# Altium PCB Iot_board_pcb.PcbDoc (part 2 of 2)
Units mm, origin at the board's own origin, x right, y up, seen from the top; angles counter-clockwise.
Board outline 52.22 x 32.36 mm, 2 copper layers (Top Layer, Bottom Layer); 44 components, 33 nets, 185 pads, 33 vias.
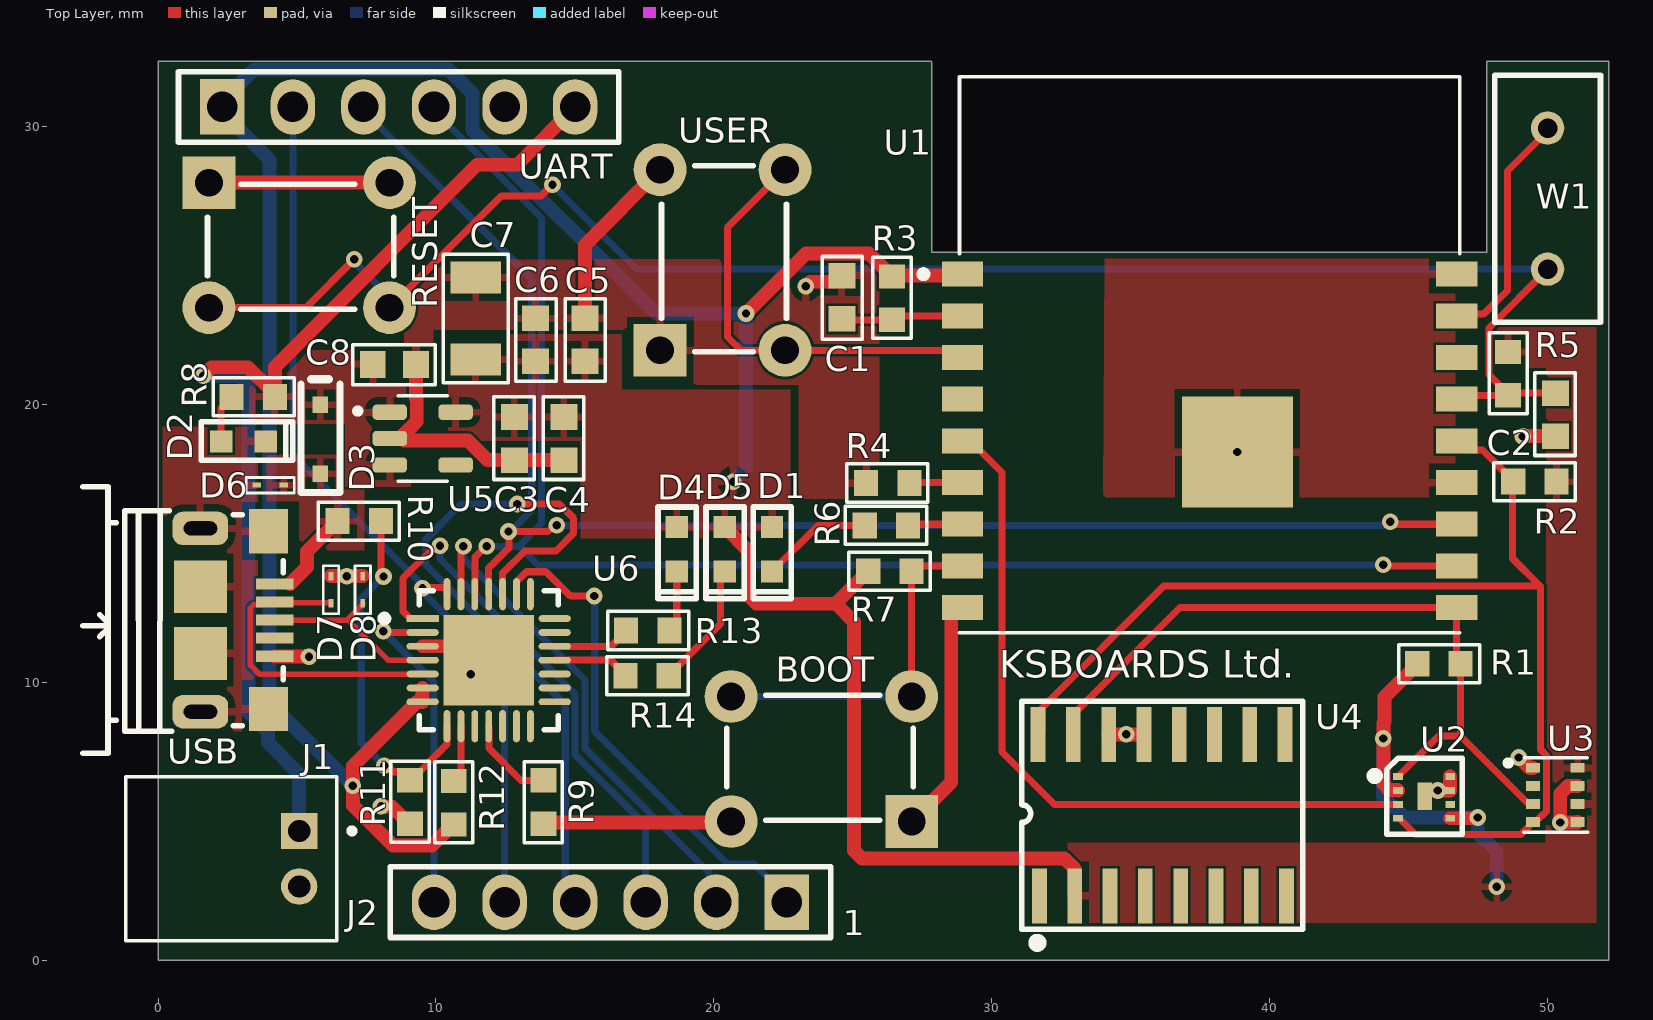
[diagram p0: Top Layer view]

## Part data (continued)
R8 R12: library part CRCW06032K00FKEA, "D11/CRCW0603 100 2K 1% ET1 e3", Case Code (Imperial)=0603, Case Code (Metric)=1608, Manufacturer=Vishay, Max Operating Temperature=155°C, Max Power Dissipation=100mW, Min Operating Temperature=-55°C, Package Quantity=10, Resistance=2kR, Resistance Tolerance=1%, Resistor Type="Thick Film", Supplier Part Number 1=541-2.00KHCT-ND, Temperature Coefficient=100ppm/°C, Voltage Rating=75V, Case/Package=0603, Category="Chip SMD Resistors", ComponentLink1Description=https://datasheet.ciiva.com/7673/1720486-7673525.pdf?src-supplier=Element14, ComponentLink1URL=https://datasheet.ciiva.com/7673/1720486-7673525.pdf?src-supplier=Element14, ComponentLink2Description=https://datasheet.ciiva.com/28621/125364-28621397.pdf?src-supplier=Element14, ComponentLink2URL=https://datasheet.ciiva.com/28621/125364-28621397.pdf?src-supplier=Element14, ComponentLink3Description=https://datasheet.ciiva.com/3257/dcrcwe3-3257366.pdf?src-supplier=Avnet, ComponentLink3URL=https://datasheet.ciiva.com/3257/dcrcwe3-3257366.pdf?src-supplier=Avnet, ComponentLink4Description=https://datasheet.ciiva.com/3257/dcrcwe3-3257367.pdf?src-supplier=Avnet, ComponentLink4URL=https://datasheet.ciiva.com/3257/dcrcwe3-3257367.pdf?src-supplier=Avnet, ComponentLink5Description=https://datasheet.ciiva.com/16882/dcrcw-16882855.pdf?src-supplier=Avnet+Europe, ComponentLink5URL=https://datasheet.ciiva.com/16882/dcrcw-16882855.pdf?src-supplier=Avnet+Europe, ComponentLink6Description=https://datasheet.ciiva.com/5551/dcrcwe3-109170-5551994.pdf?src-supplier=Mouser, ComponentLink6URL=https://datasheet.ciiva.com/5551/dcrcwe3-109170-5551994.pdf?src-supplier=Mouser, ComponentLink7Description=https://datasheet.ciiva.com/16755/70201119-16755770.pdf?src-supplier=Allied+Electronics, ComponentLink7URL=https://datasheet.ciiva.com/16755/70201119-16755770.pdf?src-supplier=Allied+Electronics, ComponentLink8Description=https://datasheet.ciiva.com/26314/fld-crcw-e3-data-en-26314682.pdf?src-supplier=Distrelec, ComponentLink8URL=https://datasheet.ciiva.com/26314/fld-crcw-e3-data-en-26314682.pdf?src-supplier=Distrelec, ComponentLink9Description=https://datasheet.ciiva.com/2465/dcrcwe3-2465564.pdf?src-supplier=Digi-Key, ComponentLink9URL=https://datasheet.ciiva.com/2465/dcrcwe3-2465564.pdf?src-supplier=Digi-Key, ComponentLink10Description=https://datasheet.ciiva.com/16765/70201119-16765388.pdf?src-supplier=Allied+Electronics, ComponentLink10URL=https://datasheet.ciiva.com/16765/70201119-16765388.pdf?src-supplier=Allied+Electronics, ComponentLink11Description=https://datasheet.ciiva.com/2465/dcrcwe3-2465565.pdf?src-supplier=Digi-Key, ComponentLink11URL=https://datasheet.ciiva.com/2465/dcrcwe3-2465565.pdf?src-supplier=Digi-Key, ComponentLink12Description=https://datasheet.ciiva.com/2465/dcrcwe3-2465566.pdf?src-supplier=Digi-Key, ComponentLink12URL=https://datasheet.ciiva.com/2465/dcrcwe3-2465566.pdf?src-supplier=Digi-Key, Construction=Rectangular, Contact Plating=Tin,Lead, Depth=0.85mm, Features="Automotive AEC-Q200", Height=0.45mm, Lead Free="Lead Free", Length=1.55mm, Manufacturer Part Number=CRCW06032K00FKEA, Military Standard=Not, Mount="Surface Mount", Number of Pins=2, Number of Terminations=2, Packaging="Tape and Reel", Power Rating=100mW, Pricing 1="1=0,10000, 10=0,03400, 100=0,01390, 1000=0,00624, 2500=0,00542 (USD)", Radiation Hardening=No, REACH SVHC=Unknown, RoHS=Yes, RoHS Compliant=Yes, Series=CRCW, Size Code=0603, Stock 1=244384, Supplier 1=Digi-Key, Technology="THICK FILM", Termination=Solder, Tolerance=1%, Voltage Rating (DC)=75V, Weight=7.1E-05oz, Width=0.85mm
R10: library part CRCW060322K0FKEA, "VISHAY - CRCW060322K0FKEA - Surface Mount Thick Film Resistor, AEC-Q200 CRCW Series, 22 kohm, 100 mW, - 1%, 75 V RoHS Compliant: Yes", Case Code (Imperial)=0603, Case Code (Metric)=1608, Manufacturer=Vishay, Max Operating Temperature=155°C, Max Power Dissipation=100mW, Min Operating Temperature=-55°C, Package Quantity=10, Resistance=22kR, Resistance Tolerance=1%, Resistor Type="Thick Film", Supplier Part Number 1=541-22.0KHCT-ND, Temperature Coefficient=100ppm/°C, Voltage Rating=75V, Case/Package=0603, Category="Chip SMD Resistors", ComponentLink1Description=https://datasheet.ciiva.com/11818/0900766b80d98afc-11818177.pdf?src-supplier=RSComponents, ComponentLink1URL=https://datasheet.ciiva.com/11818/0900766b80d98afc-11818177.pdf?src-supplier=RSComponents, ComponentLink2Description=https://datasheet.ciiva.com/15159/getdatasheetpartid-32846-15159349.pdf?src-supplier=Verical, ComponentLink2URL=https://datasheet.ciiva.com/15159/getdatasheetpartid-32846-15159349.pdf?src-supplier=Verical, ComponentLink3Description=https://datasheet.ciiva.com/2466/dcrcwe3-2466263.pdf?src-supplier=Digi-Key, ComponentLink3URL=https://datasheet.ciiva.com/2466/dcrcwe3-2466263.pdf?src-supplier=Digi-Key, ComponentLink4Description=https://datasheet.ciiva.com/7672/1697337-7672871.pdf?src-supplier=Element14, ComponentLink4URL=https://datasheet.ciiva.com/7672/1697337-7672871.pdf?src-supplier=Element14, ComponentLink5Description=https://datasheet.ciiva.com/2466/dcrcwe3-2466264.pdf?src-supplier=Digi-Key, ComponentLink5URL=https://datasheet.ciiva.com/2466/dcrcwe3-2466264.pdf?src-supplier=Digi-Key, ComponentLink6Description=https://datasheet.ciiva.com/7673/1720486-7673144.pdf?src-supplier=Element14, ComponentLink6URL=https://datasheet.ciiva.com/7673/1720486-7673144.pdf?src-supplier=Element14, ComponentLink7Description=https://datasheet.ciiva.com/16427/dcrcwe3-16427336.pdf?src-supplier=Future+Electronics, ComponentLink7URL=https://datasheet.ciiva.com/16427/dcrcwe3-16427336.pdf?src-supplier=Future+Electronics, ComponentLink8Description=https://datasheet.ciiva.com/16893/dcrcwe3-16893896.pdf?src-supplier=Avnet+Europe, ComponentLink8URL=https://datasheet.ciiva.com/16893/dcrcwe3-16893896.pdf?src-supplier=Avnet+Europe, ComponentLink9Description=https://datasheet.ciiva.com/2466/dcrcwe3-2466265.pdf?src-supplier=Digi-Key, ComponentLink9URL=https://datasheet.ciiva.com/2466/dcrcwe3-2466265.pdf?src-supplier=Digi-Key, ComponentLink10Description=https://datasheet.ciiva.com/8339/dcrcwe3-8339961.pdf?src-supplier=Avnet, ComponentLink10URL=https://datasheet.ciiva.com/8339/dcrcwe3-8339961.pdf?src-supplier=Avnet, ComponentLink11Description=https://datasheet.ciiva.com/16767/70201119-16767417.pdf?src-supplier=Allied+Electronics, ComponentLink11URL=https://datasheet.ciiva.com/16767/70201119-16767417.pdf?src-supplier=Allied+Electronics, ComponentLink12Description=https://datasheet.ciiva.com/26314/fld-crcw-e3-data-en-26314666.pdf?src-supplier=Distrelec, ComponentLink12URL=https://datasheet.ciiva.com/26314/fld-crcw-e3-data-en-26314666.pdf?src-supplier=Distrelec, Construction=Rectangular, Contact Plating=Tin, Depth=0.85mm, Features="Automotive AEC-Q200", Height=0.45mm, Lead Free="Lead Free", Length=1.55mm, Manufacturer Part Number=CRCW060322K0FKEA, Military Standard=Not, Mount="Surface Mount", Number of Terminations=2, Packaging="Tape and Reel", Power Rating=100mW, Pricing 1="1=0,10000, 10=0,03400, 100=0,01390, 1000=0,00624, 2500=0,00542 (USD)", Radiation Hardening=No, REACH SVHC=Unknown, RoHS=Yes, RoHS Compliant=Yes, Series=CRCW, Size Code=0603, Stock 1=142, Supplier 1=Digi-Key, Technology="THICK FILM", Termination=SMD/SMT, Tolerance=1%, Voltage Rating (DC)=75V, Weight=7.1E-05oz, Width=0.85mm
R11: library part CRCW060347K5FKEA, "Resistor;  Thick Film;  47.5 Kilohms;  0.1 W;  1%;  SMT;  0603;  TCR 37 ppm/DegC", Case Code (Imperial)=0603, Case Code (Metric)=1608, Manufacturer=Vishay, Max Operating Temperature=155°C, Max Power Dissipation=100mW, Min Operating Temperature=-55°C, Package Quantity=10, Resistance=47.5kR, Resistance Tolerance=1%, Resistor Type="Thick Film", Supplier Part Number 1=541-47.5KHCT-ND, Temperature Coefficient=100ppm/°C, Voltage Rating=75V, Case/Package=0603, Category="Chip SMD Resistors", ComponentLink1Description=https://datasheet.ciiva.com/11810/0900766b80d98afc-11810543.pdf?src-supplier=RSComponents, ComponentLink1URL=https://datasheet.ciiva.com/11810/0900766b80d98afc-11810543.pdf?src-supplier=RSComponents, ComponentLink2Description=https://datasheet.ciiva.com/2465/dcrcwe3-2465816.pdf?src-supplier=Digi-Key, ComponentLink2URL=https://datasheet.ciiva.com/2465/dcrcwe3-2465816.pdf?src-supplier=Digi-Key, ComponentLink3Description=https://datasheet.ciiva.com/7841/1697337-7841832.pdf?src-supplier=Element14, ComponentLink3URL=https://datasheet.ciiva.com/7841/1697337-7841832.pdf?src-supplier=Element14, ComponentLink4Description=https://datasheet.ciiva.com/2465/dcrcwe3-2465817.pdf?src-supplier=Digi-Key, ComponentLink4URL=https://datasheet.ciiva.com/2465/dcrcwe3-2465817.pdf?src-supplier=Digi-Key, ComponentLink5Description=https://datasheet.ciiva.com/7841/125364-7841833.pdf?src-supplier=Element14, ComponentLink5URL=https://datasheet.ciiva.com/7841/125364-7841833.pdf?src-supplier=Element14, ComponentLink6Description=https://datasheet.ciiva.com/2465/dcrcwe3-2465818.pdf?src-supplier=Digi-Key, ComponentLink6URL=https://datasheet.ciiva.com/2465/dcrcwe3-2465818.pdf?src-supplier=Digi-Key, ComponentLink7Description=https://datasheet.ciiva.com/16769/70201119-16769373.pdf?src-supplier=Allied+Electronics, ComponentLink7URL=https://datasheet.ciiva.com/16769/70201119-16769373.pdf?src-supplier=Allied+Electronics, ComponentLink8Description=https://datasheet.ciiva.com/16893/dcrcwe3-16893437.pdf?src-supplier=Avnet+Europe, ComponentLink8URL=https://datasheet.ciiva.com/16893/dcrcwe3-16893437.pdf?src-supplier=Avnet+Europe, Construction=Rectangular, Contact Plating=Tin, Depth=0.85mm, Features="Automotive AEC-Q200", Height=0.45mm, Lead Free="Lead Free", Length=1.55mm, Manufacturer Part Number=CRCW060347K5FKEA, Military Standard=Not, Mount="Surface Mount", Number of Terminations=2, Packaging="Tape and Reel", Power Rating=100mW, Pricing 1="1=0,10000, 10=0,03400, 100=0,01390, 1000=0,00624, 2500=0,00542 (USD)", Radiation Hardening=No, REACH SVHC=Unknown, RoHS=Yes, RoHS Compliant=Yes, Series=CRCW, Size Code=0603, Stock 1=47029, Supplier 1=Digi-Key, Technology="THICK FILM", Termination=SMD/SMT, Tolerance=1%, Voltage Rating (DC)=75V, Weight=7.1E-05oz, Width=0.85mm
R13 R14: library part CRCW0603330KFKEA, "Res Thick Film 0603 330K Ohm 1% 1/10W 100ppm/C Molded SMD Paper T/R", Case Code (Imperial)=0603, Case Code (Metric)=1608, Manufacturer=Vishay, Max Operating Temperature=155°C, Max Power Dissipation=100mW, Min Operating Temperature=-55°C, Package Quantity=10, Resistance=330kR, Resistance Tolerance=1%, Resistor Type="Thick Film", Supplier Part Number 1=541-330KHCT-ND, Temperature Coefficient=100ppm/°C, Voltage Rating=75V, Case/Package=0603, Category="Chip SMD Resistors", ComponentLink1Description=https://datasheet.ciiva.com/11810/0900766b80d98afc-11810796.pdf?src-supplier=RSComponents, ComponentLink1URL=https://datasheet.ciiva.com/11810/0900766b80d98afc-11810796.pdf?src-supplier=RSComponents, ComponentLink2Description=https://datasheet.ciiva.com/7673/1697337-7673301.pdf?src-supplier=Element14, ComponentLink2URL=https://datasheet.ciiva.com/7673/1697337-7673301.pdf?src-supplier=Element14, ComponentLink3Description=https://datasheet.ciiva.com/7673/1697337-7673302.pdf?src-supplier=Element14, ComponentLink3URL=https://datasheet.ciiva.com/7673/1697337-7673302.pdf?src-supplier=Element14, ComponentLink4Description=https://datasheet.ciiva.com/16778/70201119-16778744.pdf?src-supplier=Allied+Electronics, ComponentLink4URL=https://datasheet.ciiva.com/16778/70201119-16778744.pdf?src-supplier=Allied+Electronics, ComponentLink5Description=https://datasheet.ciiva.com/22708/1697337-22708424.pdf?src-supplier=Element14, ComponentLink5URL=https://datasheet.ciiva.com/22708/1697337-22708424.pdf?src-supplier=Element14, ComponentLink6Description=https://datasheet.ciiva.com/26317/fld-crcw-e3-data-en-26317177.pdf?src-supplier=Distrelec, ComponentLink6URL=https://datasheet.ciiva.com/26317/fld-crcw-e3-data-en-26317177.pdf?src-supplier=Distrelec, ComponentLink7Description=https://datasheet.ciiva.com/2465/dcrcwe3-2465930.pdf?src-supplier=Digi-Key, ComponentLink7URL=https://datasheet.ciiva.com/2465/dcrcwe3-2465930.pdf?src-supplier=Digi-Key, ComponentLink8Description=https://datasheet.ciiva.com/2465/dcrcwe3-2465931.pdf?src-supplier=Digi-Key, ComponentLink8URL=https://datasheet.ciiva.com/2465/dcrcwe3-2465931.pdf?src-supplier=Digi-Key, ComponentLink9Description=https://datasheet.ciiva.com/2465/dcrcwe3-2465932.pdf?src-supplier=Digi-Key, ComponentLink9URL=https://datasheet.ciiva.com/2465/dcrcwe3-2465932.pdf?src-supplier=Digi-Key, ComponentLink10Description=https://datasheet.ciiva.com/7792/125364-7792220.pdf?src-supplier=Element14, ComponentLink10URL=https://datasheet.ciiva.com/7792/125364-7792220.pdf?src-supplier=Element14, ComponentLink11Description=https://datasheet.ciiva.com/22870/70201119-22870764.pdf?src-supplier=Allied+Electronics, ComponentLink11URL=https://datasheet.ciiva.com/22870/70201119-22870764.pdf?src-supplier=Allied+Electronics, ComponentLink12Description=https://datasheet.ciiva.com/16203/dcrcwe3-16203007.pdf?src-supplier=Future+Electronics, ComponentLink12URL=https://datasheet.ciiva.com/16203/dcrcwe3-16203007.pdf?src-supplier=Future+Electronics, Construction=Rectangular, Contact Plating=Tin, Depth=0.85mm, Features="Automotive AEC-Q200", Height=0.45mm, Lead Free="Lead Free", Length=1.55mm, Manufacturer Part Number=CRCW0603330KFKEA, Military Standard=Not, Mount="Surface Mount", Number of Pins=2, Number of Terminations=2, Packaging="Tape and Reel", Power Rating=100mW, Pricing 1="1=0,10000, 10=0,03400, 100=0,01390, 1000=0,00624, 2500=0,00542 (USD)", Radiation Hardening=No, REACH SVHC=Unknown, RoHS=Yes, RoHS Compliant=Yes, Series=CRCW, Stock 1=470, Supplier 1=Digi-Key, Technology="THICK FILM", Termination=SMD/SMT, Tolerance=1%, Voltage Rating (DC)=75V, Weight=7.1E-05oz, Width=0.85mm, Working Voltage=75V
U1: Manufacturer="Espressif Systems", Supplier Part Number 1=1965-ESP-WROOM-02D(4MB)CT-ND, Manufacturer Part Number="ESP-WROOM-02D (4MB)", Pricing 1="1=3,20000 (USD)", RoHS=No, Stock 1=1303, Supplier 1=Digi-Key
U2: "Humidity/Temperature Sensor Digital Serial (I2C) 8-Pin DFN EP T/R", Manufacturer=Sensirion, Supplier Part Number 1=1649-1009-1-ND, Manufacturer Part Number=SHT30-DIS-B2.5KS, Pricing 1="1=2,78000, 10=2,52000, 25=2,25760, 50=1,99500, 100=1,94250, 500=1,62750, 1000=1,52250 (USD)", RoHS=Yes, RoHS Compliant=Yes, Stock 1=45, Supplier 1=Digi-Key
U3: "BMP280 Absolute Barometric Pressure Sensor for Battery Powered Devices 2 x 2.5mm", Case/Package=SMD/SMT, Manufacturer=Bosch, Max Operating Temperature=85°C, Min Operating Temperature=-40°C, Operating Pressure=15.95PSI, Supplier Part Number 1=828-1064-1-ND, Category="Pressure Sensors", ComponentLink1Description=https://ae-bst.resource.bosch.com/media/_tech/media/datasheets/BST-BMP280-DS001.pdf?src-supplier=Digi-Key, ComponentLink1URL=https://ae-bst.resource.bosch.com/media/_tech/media/datasheets/BST-BMP280-DS001.pdf?src-supplier=Digi-Key, Lead Free="Lead Free", Manufacturer Part Number=BMP280, Max Pressure=290.08PSI, Number of Pins=8, Output Type=SPI,I2C, Port Style="No Port", Pressure Type=Absolute, Pricing 1="1=3,26000, 5=3,02200, 10=2,51100, 25=2,09240, 50=1,86000, 100=1,76700, 500=1,48800, 1000=1,39500, 5000=1,30200 (USD)", RoHS=No, Supplier 1=Digi-Key, Termination=SMD/SMT
U4: "RTC, TCXO, CRYSTAL, 3.3V, 16SOIC", Case/Package=SOIC, Frequency=32.768kHz, Manufacturer=Maxim, Max Operating Temperature=85°C, Max Supply Voltage=5.5V, Min Operating Temperature=-40°C, Min Supply Voltage=2.3V, Operating Supply Voltage=3.3V, Package Quantity=46, Supplier Part Number 1=DS3231SN#-ND, Category="Real Time Clocks", ComponentLink1Description=https://datasheet.ciiva.com/23867/45724-23867216.pdf?src-supplier=Newark, ComponentLink1URL=https://datasheet.ciiva.com/23867/45724-23867216.pdf?src-supplier=Newark, ComponentLink2Description=https://datasheet.ciiva.com/1240/ds3231-ds3231s-1240689.pdf?src-supplier=Digi-Key, ComponentLink2URL=https://datasheet.ciiva.com/1240/ds3231-ds3231s-1240689.pdf?src-supplier=Digi-Key, ComponentLink3Description=https://datasheet.ciiva.com/1146/ds3231-1146707.pdf?src-supplier=Newark, ComponentLink3URL=https://datasheet.ciiva.com/1146/ds3231-1146707.pdf?src-supplier=Newark, ComponentLink4Description=https://datasheet.ciiva.com/1139/1675711-1139210.pdf?src-supplier=Element14, ComponentLink4URL=https://datasheet.ciiva.com/1139/1675711-1139210.pdf?src-supplier=Element14, ComponentLink5Description=https://datasheet.ciiva.com/26795/ds3231sn-26795694.pdf?src-supplier=IIIC, ComponentLink5URL=https://datasheet.ciiva.com/26795/ds3231sn-26795694.pdf?src-supplier=IIIC, ComponentLink6Description=https://datasheet.ciiva.com/25889/ds3231-25889895.pdf?src-supplier=Avnet+Europe, ComponentLink6URL=https://datasheet.ciiva.com/25889/ds3231-25889895.pdf?src-supplier=Avnet+Europe, ComponentLink7Description=https://datasheet.ciiva.com/4772/ds3231-102175-4772091.pdf?src-supplier=Mouser, ComponentLink7URL=https://datasheet.ciiva.com/4772/ds3231-102175-4772091.pdf?src-supplier=Mouser, ComponentLink8Description=https://datasheet.ciiva.com/14244/ds3231-14244059.pdf?src-supplier=Avnet, ComponentLink8URL=https://datasheet.ciiva.com/14244/ds3231-14244059.pdf?src-supplier=Avnet, ComponentLink9Description=https://datasheet.ciiva.com/12291/ds3231-102175-12291423.pdf?src-supplier=Mouser, ComponentLink9URL=https://datasheet.ciiva.com/12291/ds3231-102175-12291423.pdf?src-supplier=Mouser, Date Format=YY-MM-DD-dd, Height=2.35mm, Interface=I2C,Serial,2-Wire, Lead Free="Lead Free", Length=10.5mm, Logic Function=Clock, Manufacturer Part Number=DS3231SN#, Mount="Surface Mount", Number of Outputs=1, Number of Pins=16, Packaging=Bulk, Pricing 1="1=10,09000, 10=9,11600, 25=8,69240, 100=7,54760, 250=7,20832, 500=6,57232, 1000=5,77200 (USD)", Radiation Hardening=No, REACH SVHC=Unknown, RoHS=Yes, RoHS Compliant=Yes, Series=DS3231SN, Stock 1=339, Supplier 1=Digi-Key, Termination=SMD/SMT, Time Format=HH:MM:SS, Weight=0.023492oz, Width=7.6mm
U5: "ANALOG DEVICES         ADP160AUJZ-3.3-R7.             LDO VOLTAGE REGULATOR, FIXED, 3.3V, 150mA, TSOT-5", Case/Package=TSOT, Dropout Voltage=120mV, Manufacturer="Analog Devices", Max Input Voltage=5.5V, Max Operating Temperature=125°C, Max Output Current=150mA, Max Output Voltage=4.2V, Max Supply Current=42uA, Min Current Limit=220mA, Min Input Voltage=2.2V, Min Operating Temperature=-40°C, Min Output Voltage=1.2V, Nominal Output Voltage=3.3V, Power Supply Rejection Ratio (PSRR)=60dB, Quiescent Current=860nA, Supplier Part Number 1=ADP160AUJZ-3.3-R7CT-ND, Accuracy=2%, Category="Voltage Regulators - Linear", ComponentLink1Description=https://datasheet.ciiva.com/2040/adp160-161-162-163-2040742.pdf?src-supplier=Digi-Key, ComponentLink1URL=https://datasheet.ciiva.com/2040/adp160-161-162-163-2040742.pdf?src-supplier=Digi-Key, ComponentLink2Description=https://datasheet.ciiva.com/2040/adp160-161-162-163-2040744.pdf?src-supplier=Digi-Key, ComponentLink2URL=https://datasheet.ciiva.com/2040/adp160-161-162-163-2040744.pdf?src-supplier=Digi-Key, ComponentLink3Description=https://datasheet.ciiva.com/3223/adp160-161-162-163-3223369.pdf?src-supplier=Avnet, ComponentLink3URL=https://datasheet.ciiva.com/3223/adp160-161-162-163-3223369.pdf?src-supplier=Avnet, ComponentLink4Description=https://datasheet.ciiva.com/17365/adp160-161-162-163-17365691.pdf?src-supplier=Avnet+Europe, ComponentLink4URL=https://datasheet.ciiva.com/17365/adp160-161-162-163-17365691.pdf?src-supplier=Avnet+Europe, ComponentLink5Description=https://datasheet.ciiva.com/2040/adp160-161-162-163-2040743.pdf?src-supplier=Digi-Key, ComponentLink5URL=https://datasheet.ciiva.com/2040/adp160-161-162-163-2040743.pdf?src-supplier=Digi-Key, ComponentLink6Description=https://datasheet.ciiva.com/48694/001251311-da-01-en-ic-reg-l-adp160aujz-3-3-r7-tsot-23-5-adi-48694619.pdf?src-supplier=Conrad, ComponentLink6URL=https://datasheet.ciiva.com/48694/001251311-da-01-en-ic-reg-l-adp160aujz-3-3-r7-tsot-23-5-adi-48694619.pdf?src-supplier=Conrad, Contact Plating=Tin,Matte, Height=0.9mm, Lead Free="Contains Lead", Length=2.9mm, Manufacturer Part Number=ADP160AUJZ-3.3-R7, Mount="Surface Mount", Nominal Supply Current=42uA, Number of Outputs=1, Number of Pins=5, Number of Regulators=1, Operating Supply Current=42uA, Output Current=150mA, Output Type=Fixed, Output Voltage=3.3V, Packaging="Cut Tape", Polarity=Positive, Pricing 1="1=1,19000, 10=1,06300, 25=1,00920, 100=0,77490, 250=0,68476, 500=0,64872, 1000=0,50456 (USD)", Radiation Hardening=No, REACH SVHC="No SVHC", RoHS=Yes, RoHS Compliant=Yes, Series=-, Stock 1=5750, Supplier 1=Digi-Key, Width=1.6mm
U6: "IC BRIDGE USB TO UART 28QFN", Case/Package=QFN, Manufacturer="Silicon Labs", Max Operating Temperature=85°C, Max Supply Voltage=3.6V, Min Operating Temperature=-40°C, Min Supply Voltage=3V, Supplier Part Number 1=336-3694-ND, Category="USB Interface ICs", ComponentLink1Description=http://www.farnell.com/datasheets/2245279.pdf?src-supplier=Farnell, ComponentLink1URL=http://www.farnell.com/datasheets/2245279.pdf?src-supplier=Farnell, ComponentLink2Description=http://www.silabs.com/documents/public/data-sheets/cp2102n-datasheet.pdf?src-supplier=Arrow+Electronics, ComponentLink2URL=http://www.silabs.com/documents/public/data-sheets/cp2102n-datasheet.pdf?src-supplier=Arrow+Electronics, ComponentLink3Description=https://www.silabs.com/documents/public/data-sheets/cp2102n-datasheet.pdf?src-supplier=Digi-Key, ComponentLink3URL=https://www.silabs.com/documents/public/data-sheets/cp2102n-datasheet.pdf?src-supplier=Digi-Key, ComponentLink4Description=http://www.farnell.com/datasheets/2060533.pdf?src-supplier=Element14, ComponentLink4URL=http://www.farnell.com/datasheets/2060533.pdf?src-supplier=Element14, ComponentLink5Description=http://www.silabs.com/documents/public/data-sheets/cp2102n-datasheet.pdf?src-supplier=Verical, ComponentLink5URL=http://www.silabs.com/documents/public/data-sheets/cp2102n-datasheet.pdf?src-supplier=Verical, ComponentLink6Description=http://www.silabs.com/documents/public/data-sheets/cp2102n-datasheet.pdf?src-supplier=Mouser, ComponentLink6URL=http://www.silabs.com/documents/public/data-sheets/cp2102n-datasheet.pdf?src-supplier=Mouser, ComponentLink7Description=http://www.silabs.com/documents/public/data-sheets/cp2102n-datasheet.pdf?src-supplier=Symmetry+Electronics, ComponentLink7URL=http://www.silabs.com/documents/public/data-sheets/cp2102n-datasheet.pdf?src-supplier=Symmetry+Electronics, Manufacturer Part Number=CP2102N-A01-GQFN28, Number of Pins=28, REACH SVHC=Unknown, RoHS=No, Supplier 1=Digi-Key
USB: library part 10118193-0001LF, "CONN USB MICRO B RECPT SMT R/A", Color=Black, Current Rating=1.8A, Flammability Rating="UL94 V-0", Insulation Resistance=1GR, Manufacturer="Amphenol FCI", Max Operating Temperature=85°C, Max Voltage Rating (AC)=100V, Min Operating Temperature=-55°C, Package Quantity=1200, Supplier Part Number 1=609-4616-1-ND, Category="USB Connectors", ComponentLink1Description=https://datasheet.ciiva.com/851/10118193-851106.pdf?src-supplier=Digi-Key, ComponentLink1URL=https://datasheet.ciiva.com/851/10118193-851106.pdf?src-supplier=Digi-Key, ComponentLink2Description=https://datasheet.ciiva.com/26853/getdatasheetpartid-418618-26853893.pdf?src-supplier=Verical, ComponentLink2URL=https://datasheet.ciiva.com/26853/getdatasheetpartid-418618-26853893.pdf?src-supplier=Verical, ComponentLink3Description=https://datasheet.ciiva.com/4598/10118193ac-197151-4598799.pdf?src-supplier=Mouser, ComponentLink3URL=https://datasheet.ciiva.com/4598/10118193ac-197151-4598799.pdf?src-supplier=Mouser, ComponentLink4Description=https://datasheet.ciiva.com/14802/10118193-0001lf-webpage-14802386.pdf?src-supplier=Arrow+Electronics, ComponentLink4URL=https://datasheet.ciiva.com/14802/10118193-0001lf-webpage-14802386.pdf?src-supplier=Arrow+Electronics, ComponentLink5Description=https://datasheet.ciiva.com/851/10118193-851107.pdf?src-supplier=Digi-Key, ComponentLink5URL=https://datasheet.ciiva.com/851/10118193-851107.pdf?src-supplier=Digi-Key, ComponentLink6Description=https://datasheet.ciiva.com/851/10118193-851108.pdf?src-supplier=Digi-Key, ComponentLink6URL=https://datasheet.ciiva.com/851/10118193-851108.pdf?src-supplier=Digi-Key, ComponentLink7Description=https://datasheet.ciiva.com/14618/70236827-14618887.pdf?src-supplier=Allied+Electronics, ComponentLink7URL=https://datasheet.ciiva.com/14618/70236827-14618887.pdf?src-supplier=Allied+Electronics, Connector Type=USB,Receptacle, Contact Material="Copper Alloy", Contact Plating=Gold, Depth=5.67mm, Features=Shielded, Gender=Female, Housing Material=Polymer, Length=7.86mm, Manufacturer Part Number=10118193-0001LF, Mount="Surface Mount,Horizontal", Number of Contacts=5, Number of Ports=1, Number of Terminals/Pins=5, Orientation="Right Angle", Packaging="Tape and Reel", Pitch=0.65mm, Pricing 1="1=0,45000, 10=0,43000, 25=0,36840, 50=0,31320, 100=0,30090, 250=0,27016, 500=0,25788 (USD)", Radiation Hardening=No, RoHS=Yes, Stock 1=68220, Supplier 1=Digi-Key, Termination=Solder, Voltage Rating=100V
W1: "Jumper Wire", LatestRevisionDate=17-Jul-2002, LatestRevisionNote="Re-released for DXP Platform.", PackageDescription="Radial Cap, Thru-Hole; 2 Leads; 0.2 in Pin Spacing", PackageReference=RAD-0.2, Published=24-Mar-1999, Publisher="Altium Limited"

## Via types
v1: diameter 0.6, hole 0.3, Top Layer to Bottom Layer, 33 vias

## Nets (pads, with @x,y where several pads share a name; then routed paths per layer and width w, separated by ;. In a path a pad name is that pad's centre, name@x,y a point inside that pad or via, vN(x,y) a via of type N, cw(c..) or ccw(c..) an arc to the next point about the centre after c; other vN are vias at no path point)
3V3: C3.2 C4.2 C5.2 C6.2 C7.2 D1.2 D4.2 D5.2 R1.1 R2.1 R3.2 R5.2 R7.2 R12.1 U1.1 U2.2 U2.5 U3.6 U3.8 U4.2 U5.5 U6.6 U6.7 UART.1 | length 116.7
  Top Layer w0.5: U6.6 U6.7 9.324,9.294 7.01,6.98 v1(7.01,6.271) 7.01,5.563 8.448,4.125 9.853,4.125 10.613,4.884 R12.1 ; D5.2 21.253,14.726 21.253,13.12 21.546,12.827 24.391,12.827 ; v1(21.159,23.271) 23.324,25.436 25.586,25.436 26.201,24.82 26.201,24.79 26.386,24.605 R3.2 26.457,24.646 28.913,24.646 U1.1 ; R7.2 24.391,12.827 ; U4.2 32.98,2.326 32.98,3.289 32.617,3.651 25.343,3.651 25.05,3.944 25.05,12.168 24.391,12.827 ; U2.2 44.605,6.127 44.31,6.127 44.103,6.334 44.103,8.543 44.145,8.585 44.145,9.462 45.321,10.638 R1.1 ; U2.5 47.471,5.104 v1(47.498,5.131)
  Bottom Layer w0.5: v1(7.01,6.271) 4.013,9.269 4.013,28.807 2.311,30.509 UART.1 2.311,30.909 2.861,31.459 3.461,32.059 10.461,32.059 11.321,31.198 11.321,29.866 17.917,23.271 v1(21.159,23.271) 21.159,17.707 20.701,17.248 v1(20.701,17.221) ; v1(44.094,7.976) 44.094,5.893 44.856,5.131 v1(47.498,5.131) 47.498,4.572 48.184,3.886 v1(48.184,2.642)
5V_ext: C8.2 D3.1 J1.1 R8.2 U5.1 U5.3 UART.6 | length 37.6
  Top Layer w0.5: v1(1.626,21.031) 1.93,21.336 3.239,21.336 4.024,20.551 4.024,20.454 R8.2 4.203,20.276 4.203,20.454 4.203,21.348 11.481,28.626 12.929,28.626 UART.6
  Bottom Layer w0.5: v1(1.626,21.031) 1.635,21.022 2.958,21.022 3.251,20.729 3.251,8.915 3.962,8.204 3.962,7.823 5.08,6.706 J1.1
CON_USB_N: D7.1 U6.5 USB.2 | length 11.4
  Top Layer w0.2: D7.1 6.211,12.865 4.221,12.865 USB.2 4.099,12.787 3.441,12.787 3.324,12.669 3.324,10.621 3.658,10.287 9.518,10.287 U6.5
CON_USB_P: D8.1 U6.4 USB.3 | length 6.8
  Top Layer w0.2: USB.3 6.797,12.237 ; D8.1 7.366,12.805 6.797,12.237 ; U6.4 8.282,10.794 6.839,12.237 6.797,12.237
CTS: J2.1 U6.23 | length 17.8
  Top Layer w0.254: U6.23@12.907,13.623 13.053,13.769 13.053,13.773 13.257,13.977 13.967,13.977 14.838,13.106 v1(15.697,13.106)
  Bottom Layer w0.254: v1(15.697,13.106) 15.718,13.086 15.718,8.233 20.496,3.454 21.46,3.454 22.631,2.283 J2.1
DCD: J2.3 U6.1 | length 19.7
  Top Layer w0.254: U6.1 9.078,12.294 8.818,12.553 8.818,13.746 9.837,14.765 9.908,14.765 10.054,14.91 v1(10.147,14.91)
  Bottom Layer w0.254: v1(10.147,14.91) 10.147,14.44 15.01,9.577 15.01,7.418 15.011,7.417 15.011,7.391 17.551,4.851 J2.3
DSR: J2.2 U6.27 | length 18.3
  Top Layer w0.254: U6.27 10.901,14.77 10.991,14.86 v1(10.991,14.894)
  Bottom Layer w0.254: v1(10.991,14.894) 10.998,14.887 10.998,14.453 15.364,10.087 15.364,7.623 19.834,3.153 19.834,2.34 J2.2
DTR: J2.5 U6.28 UART.2 | length 32.9
  Top Layer w0.254: v1(9.516,13.377) 9.555,13.416 10.395,13.416 10.401,13.411 U6.28
  Bottom Layer w0.254: UART.2 4.851,18.178 9.398,13.631 9.516,13.513 v1(9.516,13.377) 9.516,13.242 12.471,10.287 J2.5
GND: BOOT.1 BOOT.2 C1.1 C2.1 C3.1 C4.1 C5.1 C6.1 C7.1 C8.1 D2.1 D6.2 D7.2 D8.2 J1.2 R4.2 R9.2 R11.1 RESET.1 RESET.2 U1.9 U1.13 U1.18 U1.19 U2.7 U2.8 U2.9 U3.1 U3.5 U3.7 U4.13 U4.14 U5.2 U6.3 U6.29 UART.5 USB.5 USB.6 USB.7 USB.8 USB.9 USB.10 USB.11 USER.1 USER.2 | length 52.7
  Top Layer w0.5: RESET.1 RESET.2 ; USB.5 4.214,10.922 v1(5.436,10.922) ; D7.2 v1(6.794,13.818) D8.2 ; v1(8.026,5.537) 8.046,5.518 8.429,5.518 9.038,4.91 R11.1 ; U5.2 8.635,18.771 8.66,18.746 8.826,18.746 8.877,18.694 11.151,18.694 11.849,17.996 C4.1 ; U5.2@8.685,18.771 9.01,19.096 9.024,19.096 9.31,19.381 9.31,20.177 9.284,20.203 C8.1 ; U6.3 11.401,11.294 U6.29 ; R9.2 13.908,4.949 20.586,4.949 BOOT.2 ; C5.1 15.367,25.744 USER.2 ; v1(23.317,24.257) 23.476,24.416 24.403,24.416 C1.1 ; BOOT.1 28.55,6.413 28.55,12.487 28.75,12.687 U1.9 ; U4.14 v1(34.849,8.125) U4.13 ; U2.9 45.593,6.092 45.605,6.104 U2.7 U2.8 ; v1(48.971,7.29) 48.998,7.29 49.369,6.919 U3.1 ; v1(49.124,18.847) 49.136,18.859 C2.1 ; U3.5 51.073,4.95 v1(50.47,4.95) 50.47,6 50.739,6.269 U3.7
  other v1: 46.056,6.104 11.252,10.287 38.846,18.287
IO0: BOOT.3 BOOT.4 R7.1 U1.8 | length 12.9
  Top Layer w0.254: BOOT.3 27.126,13.989 R7.1 27.311,14.187 U1.8
  Bottom Layer w0.254: BOOT.4 BOOT.3
IO2: R6.1 U1.7 | length 2
  Top Layer w0.254: R6.1 27.033,15.687 U1.7
IO14: U1.3 USER.3 USER.4 | length 15.6
  Top Layer w0.254: USER.4 20.498,26.375 20.498,22.428 20.979,21.947 USER.3 28.693,21.947 U1.3
NetC1_2: C1.2 R3.1 U1.2 | length 4.4
  Top Layer w0.254: C1.2 24.643,23.045 R3.1 26.557,23.187 U1.2
NetD1_1: D1.1 R6.2 | length 4
  Top Layer w0.254: D1.1 23.762,15.646 R6.2
NetD2_2: D2.2 R8.1 | length 1.8
  Top Layer w0.254: D2.2 2.273,19.864 2.649,20.239 R8.1
NetD4_1: D4.1 R13.2 | length 2.2
  Top Layer w0.254: R13.2 18.669,12.123 D4.1
NetD5_1: D5.1 R14.2 | length 4.4
  Top Layer w0.254: R14.2 18.382,10.266 18.69,10.574 18.72,10.574 20.244,12.098 20.244,13.83 D5.1@20.287,13.874
NetR4_1: R4.1 U1.6 | length 1.9
  Top Layer w0.254: R4.1 27.06,17.187 U1.6
NetR9_1: R9.1 U6.11 | length 3.2
  Top Layer w0.254: U6.11 11.907,8.412 11.907,7.626 13.063,6.47 R9.1
NetR10_1: R10.1 R11.2 U6.8 | length 13.2
  Top Layer w0.254: R10.1 8.019,13.901 v1(8.112,13.809) ; v1(8.145,6.994) 8.238,6.994 8.454,6.778 8.76,6.778 R11.2 9.098,6.47 10.395,7.767 10.395,8.412 U6.8
  Bottom Layer w0.254: v1(8.112,13.809) 7.29,12.987 7.29,11.76 7.314,11.736 7.314,7.825 v1(8.145,6.994)
NetR12_2: R12.2 U6.9 | length 2.1
  Top Layer w0.254: R12.2 10.901,6.703 U6.9
NetU1_17: U1.17 W1.1 | length 8.7
  Top Layer w0.254: U1.17 46.805,23.253 47.713,23.253 48.565,24.105 48.565,28.401 48.714,28.55 48.717,28.55 50.013,29.845 W1.1
RI: J2.6 U6.2 | length 12
  Top Layer w0.254: v1(8.103,11.836) 8.145,11.794 U6.2
  Bottom Layer w0.254: v1(8.103,11.836) 9.931,10.008 J2.6
RST: C2.2 R5.1 RESET.3 RESET.4 U1.15 W1.2 | length 62.3
  Top Layer w0.254: RESET.3 5.319,23.48 v1(7.061,25.222) ; RESET.4 12.358,27.508 13.792,27.508 v1(14.195,27.911) ; U1.15 46.879,20.327 R5.1 48.672,20.409 C2.2 ; R5.1@48.56,20.409 48.478,20.409 48.252,20.635 48.252,20.717 47.898,21.071 47.898,22.752 W1.2
  Bottom Layer w0.254: v1(7.061,25.222) 7.061,25.129 8.33,23.86 RESET.4 ; v1(14.195,27.911) 14.195,27.897 17.226,24.867 W1.2
RTSc: J2.4 U6.24 | length 25.8
  Top Layer w0.254: U6.24 12.401,13.925 13.202,14.726 14.319,14.726 14.961,15.367 14.961,15.9 14.448,16.413 v1(12.924,16.413)
  Bottom Layer w0.254: v1(12.924,16.413) 10.905,16.413 9.62,15.128 9.62,14.239 14.656,9.203 14.656,3.003 15.011,2.647 J2.4
RX_Led: R14.1 U6.18 | length 2.8
  Top Layer w0.254: U6.18 16.295,10.794 16.822,10.266 R14.1
RXD: U1.12 U6.25 UART.3 | length 55
  Top Layer w0.254: U6.25 11.901,14.111 12.624,14.834 v1@12.624,15.367 ; v1(12.615,15.426) 14.032,15.426 14.252,15.646 v1(14.346,15.646) ; v1(44.348,15.773) 44.435,15.687 U1.12
  Bottom Layer w0.254: UART.3 7.391,30.583 13.451,24.523 13.451,16.194 12.683,15.426 v1(12.615,15.426) ; v1(14.346,15.646) 44.128,15.646 44.255,15.773 v1(44.348,15.773)
SCL: R2.2 U1.14 U2.4 U3.4 U4.16 | length 41.7
  Top Layer w0.254: U4.16 31.812,8.263 31.812,9.079 36.197,13.464 49.741,13.464 ; U2.4@44.676,5.102 45.257,4.521 49.045,4.521 49.369,4.846 49.369,4.921 49.417,4.969 U3.4 ; U1.14 47.061,18.364 47.663,18.364 48.775,17.251 R2.2 48.743,17.188 48.743,14.463 49.741,13.464 ; U3.4@49.567,4.969 49.795,5.196 49.816,5.196 49.969,5.35 49.969,7.367 49.764,7.572 49.764,13.441 49.741,13.464
SDA: R1.2 U1.10 U2.1 U3.3 U4.15 | length 27.3
  Top Layer w0.254: U4.15 32.944,8.85 36.78,12.687 U1.10 46.738,10.81 R1.2 46.881,8.059 ; U2.1 46.083,8.059 46.881,8.059 ; U3.3 49.444,5.667 49.274,5.667 46.881,8.059
T_H: U1.5 U2.3 | length 27
  Top Layer w0.254: U1.5 29.246,18.687 30.378,17.554 30.378,7.493 32.267,5.604 U2.3
TX_Led: R13.1 U6.19 | length 2.8
  Top Layer w0.254: U6.19 16.309,11.294 16.848,11.832 R13.1
TXD: U1.11 U6.26 UART.4 | length 54.9
  Top Layer w0.254: U6.26 11.401,14.5 11.792,14.891 v1(11.836,14.891) ; v1(44.094,14.224) 44.132,14.187 U1.11
  Bottom Layer w0.254: UART.4 9.931,30.582 13.805,26.708 13.805,15.71 13.008,14.913 13.008,14.894 ; v1(11.836,14.891) 13.005,14.891 13.008,14.894 ; v1(44.094,14.224) 13.678,14.224 13.008,14.894
Vbus: D3.2 D6.1 R10.2 USB.1 | length 2.8
  Top Layer w0.5: USB.1@4.748,13.537 5.359,14.148 5.359,14.699 R10.2@6.332,15.672
pads on no net: U1.4 U1.16 U2.6 U3.2 U4.1 U4.3 U4.4 U4.5 U4.6 U4.7 U4.8 U4.9 U4.10 U4.11 U4.12 U5.4 U6.10 U6.12 U6.13 U6.14 U6.15 U6.16 U6.17 U6.20 U6.21 U6.22 USB.4

## Polygon pours and split planes (outlines as drawn)
5V_ext on Top Layer "5V_EXT_L01_P001" (solid, remove dead copper, pour order 1): 3.277,21.946 8.255,21.946 8.255,20.701 9.093,20.701 9.093,17.043 6.731,17.043 6.731,19.304 3.277,19.304
GND on Top Layer "GND_L01_P006" (solid, remove dead copper, pour order 6): 0.178,19.202 3.581,19.202 3.581,8.23 0.16,8.23
GND on Top Layer "GND_L01_P004" (solid, remove dead copper, pour order 4): 8.865,25.21 25.959,25.235 25.959,16.612 23.063,16.612 23.063,20.701 16.789,20.701 16.789,22.682 9.957,22.682 9.906,22.733 9.906,20.955 8.865,20.955
3V3 on Top Layer "3V3_L01_P008" (solid, remove dead copper, pour order 8): 49.973,21.311 48.108,21.311 48.108,22.784 51.765,22.784 51.765,1.346 32.741,1.346 32.741,4.216 49.95,4.216
3V3 on Top Layer "3V3_L01_P003" (solid, remove dead copper, pour order 3): 10.439,22.53 16.688,22.53 16.688,20.523 22.758,20.523 22.758,15.189 15.215,15.189 15.215,18.694 10.439,18.694
GND on Top Layer "GND_L01_P005" (solid, remove dead copper, pour order 5): 34.072,25.248 46.685,25.248 46.685,16.662 34.026,16.662
Vbus on Top Layer "VBUS_L01_P002" (solid, remove dead copper, pour order 2): 3.912,18.186 6.655,18.186 6.655,16.967 7.417,16.967 7.417,14.757 5.08,14.757 5.08,16.51 3.912,16.51
GND on Bottom Layer "GND_L02_P000" (solid, remove dead copper, pour order 0): 0.152,31.598 27.508,31.598 27.508,25.171 27.559,25.121 48.158,25.121 52.07,25.121 52.07,0.483 51.994,0.406 51.918,0.483 0.152,0.483

## Silkscreen, mask and mechanical layers (free items; w line width, h text height)
Top Overlay:
  text "KSBOARDS Ltd." at 30.275,10.158 h1
Bottom Overlay:
  text "3V3" at 0.637,30.047 h0.5 r90
  text "DTR" at 4.113,28.751 h0.5
  text "RX" at 6.45,28.751 h0.5
  text "GND" at 12.165,28.751 h0.5
  text "TX" at 9.904,28.726 h0.5
  text "5V" at 14.908,28.726 h0.5
  text "WWW.KSBOARDS.COM" at 9.901,17.801 h2
  text "support@ksboards.com" at 5.532,13.819 h2
  text "5V" at 7.725,4.137 h1 r90
  text "RTS" at 14.629,3.58 h0.5
  text "RI" at 9.523,3.554 h0.5
  text "DCD" at 16.889,3.554 h0.5
  text "DTR" at 12.013,3.529 h0.5
  text "CTS" at 22.147,3.504 h0.5
  text "DSR" at 18.947,3.478 h0.5
  text "GND" at 7.649,0.683 h1 r90
Fab Notes:
  drawing of 191 lines, arcs and shapes, not listed
  text "Iot Board ESP8266 V1" at 7.968,42.588 h2
  text "www.ksboards.com" at 57.996,2.481 h2 r90
  text "Contact: support@ksboards.com" at 62.065,-3.129 h1.5 r90
  text "Board Infos:" at -0.773,-5.929 h3
  text "Layer" at 0.409,-9.804 h1.52
  text "Name" at 10.82,-9.804 h1.52
  text "Material" at 34.436,-9.804 h1.52
  text "Thickness" at 56.274,-9.804 h1.52
  text "Constant" at 72.78,-9.804 h1.52
  text "Board Layer Stack" at 87.254,-9.804 h1.52
  text "Top Overlay" at 10.82,-12.852 h1.52
  text "Top Solder" at 10.82,-15.9 h1.52
  text "Solder Resist" at 34.436,-15.9 h1.52
  text "0,010mm" at 56.274,-15.9 h1.52
  text "3,5" at 72.78,-15.9 h1.52
  text "1" at 0.409,-18.948 h1.52
  text "Top Layer" at 10.82,-18.948 h1.52
  text "Copper" at 34.436,-18.948 h1.52
  text "0,036mm" at 56.274,-18.948 h1.52
  text "Dielectric 1" at 10.82,-21.996 h1.52
  text "FR-4" at 34.436,-21.996 h1.52
  text "0,320mm" at 56.274,-21.996 h1.52
  text "4,8" at 72.78,-21.996 h1.52
  text "2" at 0.409,-25.044 h1.52
  text "Bottom Layer" at 10.82,-25.044 h1.52
  text "Copper" at 34.436,-25.044 h1.52
  text "0,036mm" at 56.274,-25.044 h1.52
  text "Bottom Solder" at 10.82,-28.092 h1.52
  text "Solder Resist" at 34.436,-28.092 h1.52
  text "0,010mm" at 56.274,-28.092 h1.52
  text "3,5" at 72.78,-28.092 h1.52
  text "Bottom Overlay" at 10.82,-31.14 h1.52
  text "Total board thickness:" at 0.409,-34.188 h1.52
  text "0,411mm" at 56.274,-34.188 h1.52
Mechanical Drawings:
  lines w0.7: -0.279,-0.279 -0.279,32.614 52.426,32.614 52.426,-0.279 -0.279,-0.279
Top Assembly (Mech29):
  lines w0.254: -4.506,0.918 -4,-0.607 ; -4.46,31.296 -3.949,32.819 ; -4.254,-0.607 -3.746,-0.608 ; -4.203,32.82 -3.695,32.819 ; -3.987,8.082 -4,-0.607 ; -3.962,24.13 -3.949,32.819 ; -3.49,0.916 -4,-0.607 ; -3.444,31.295 -3.949,32.819 ; -0.61,-1.905 -0.609,-1.397 ; 0.914,-2.161 -0.61,-1.651 ; 0.915,-1.145 -0.61,-1.651 ; 18.149,-1.674 -0.61,-1.651 ; 33.943,-1.694 52.703,-1.717 ; 51.178,-2.223 52.703,-1.717 ; 51.179,-1.207 52.703,-1.717 ; 52.702,-1.971 52.703,-1.463
  text "Top Assembly Layer" at 9.339,39.292 h2
  text "33.426 (mm)" at -3.072,8.335 h1.52 r89.91
  text "53.312 (mm)" at 18.402,-2.589 h1.52 r359.93
Bottom Assembly (Mech30):
  text "Bottom Assembly Layer" at 7.383,34.948 h2

## Text inside footprints (layer, text, board x,y; h text height)
J2: Top Overlay "1" at 24.635,0.886 h0.9